# Altium PCB ESP01S麦轮.PcbDoc
Units mm, origin at the board's own origin, x right, y up, seen from the top; angles counter-clockwise.
Board outline 60 x 86 mm, 2 copper layers (Top Layer, Bottom Layer); 22 components, 20 nets, 85 pads, 21 vias.
Unrouted connection lines stored in the file: 18.
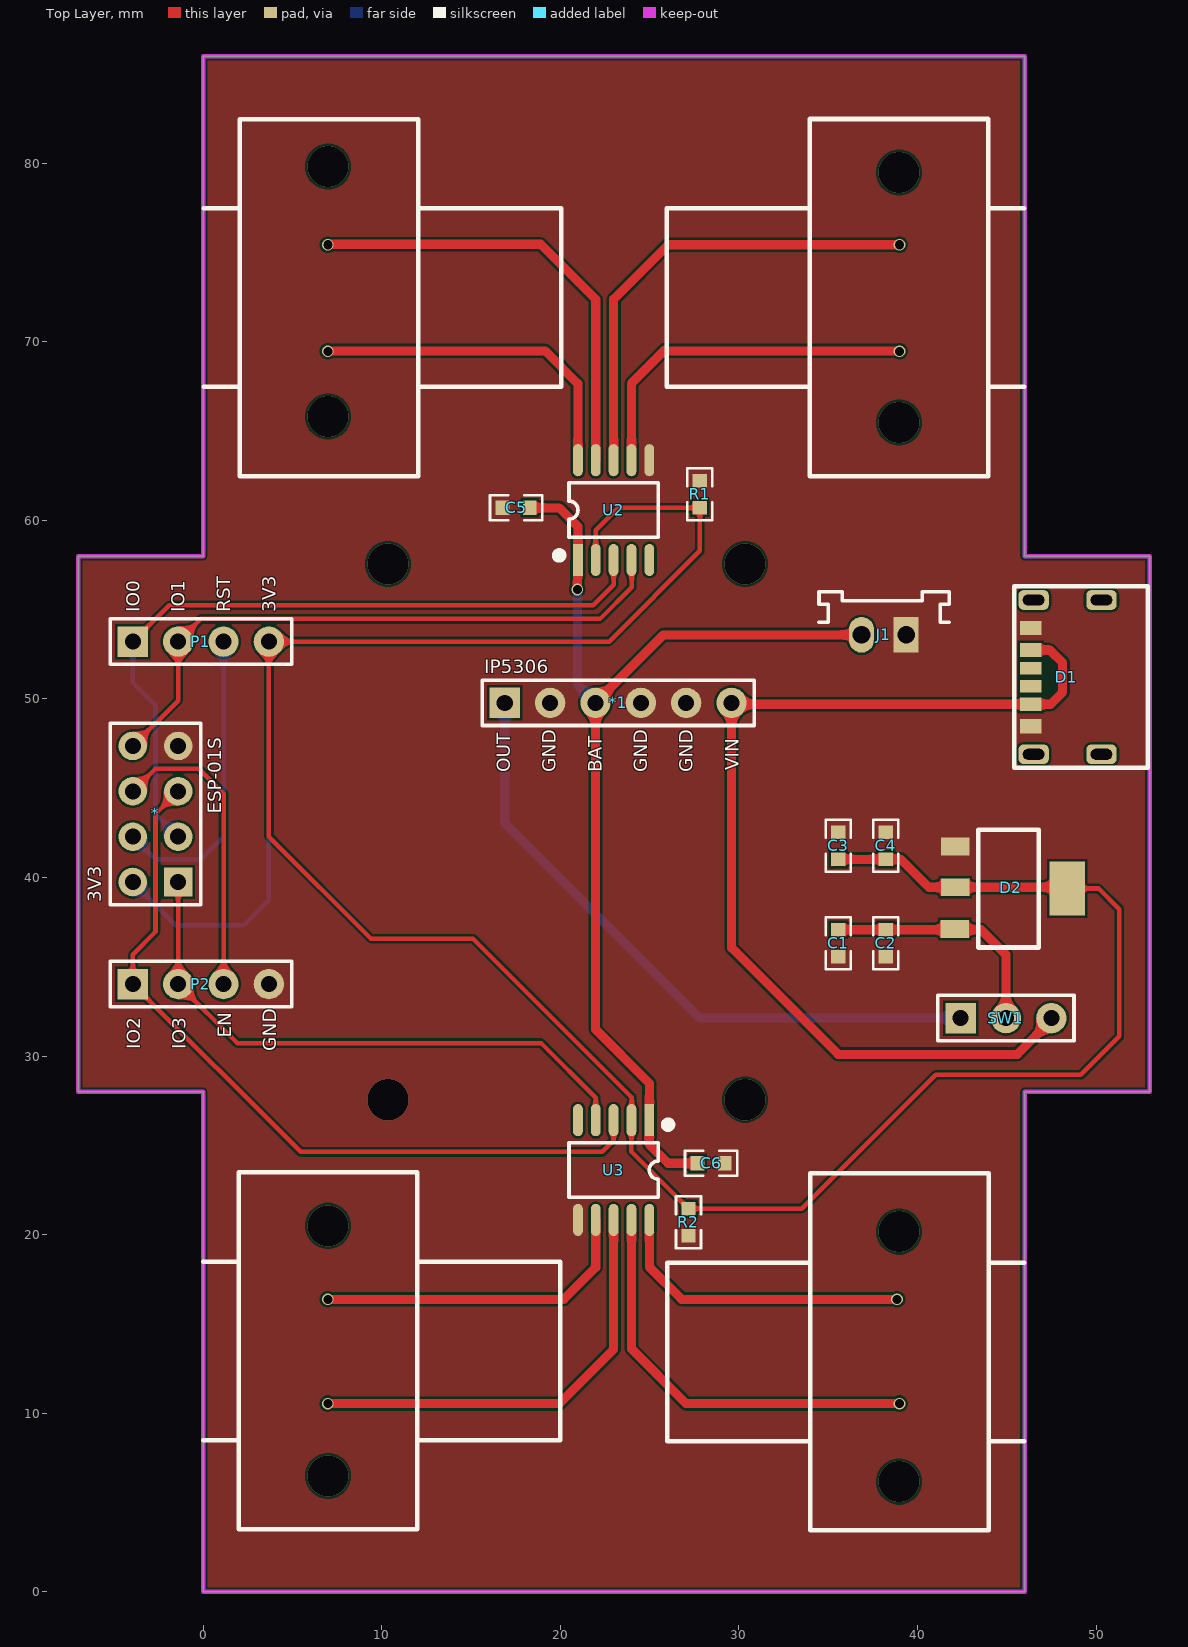
[diagram p0: Top Layer view]
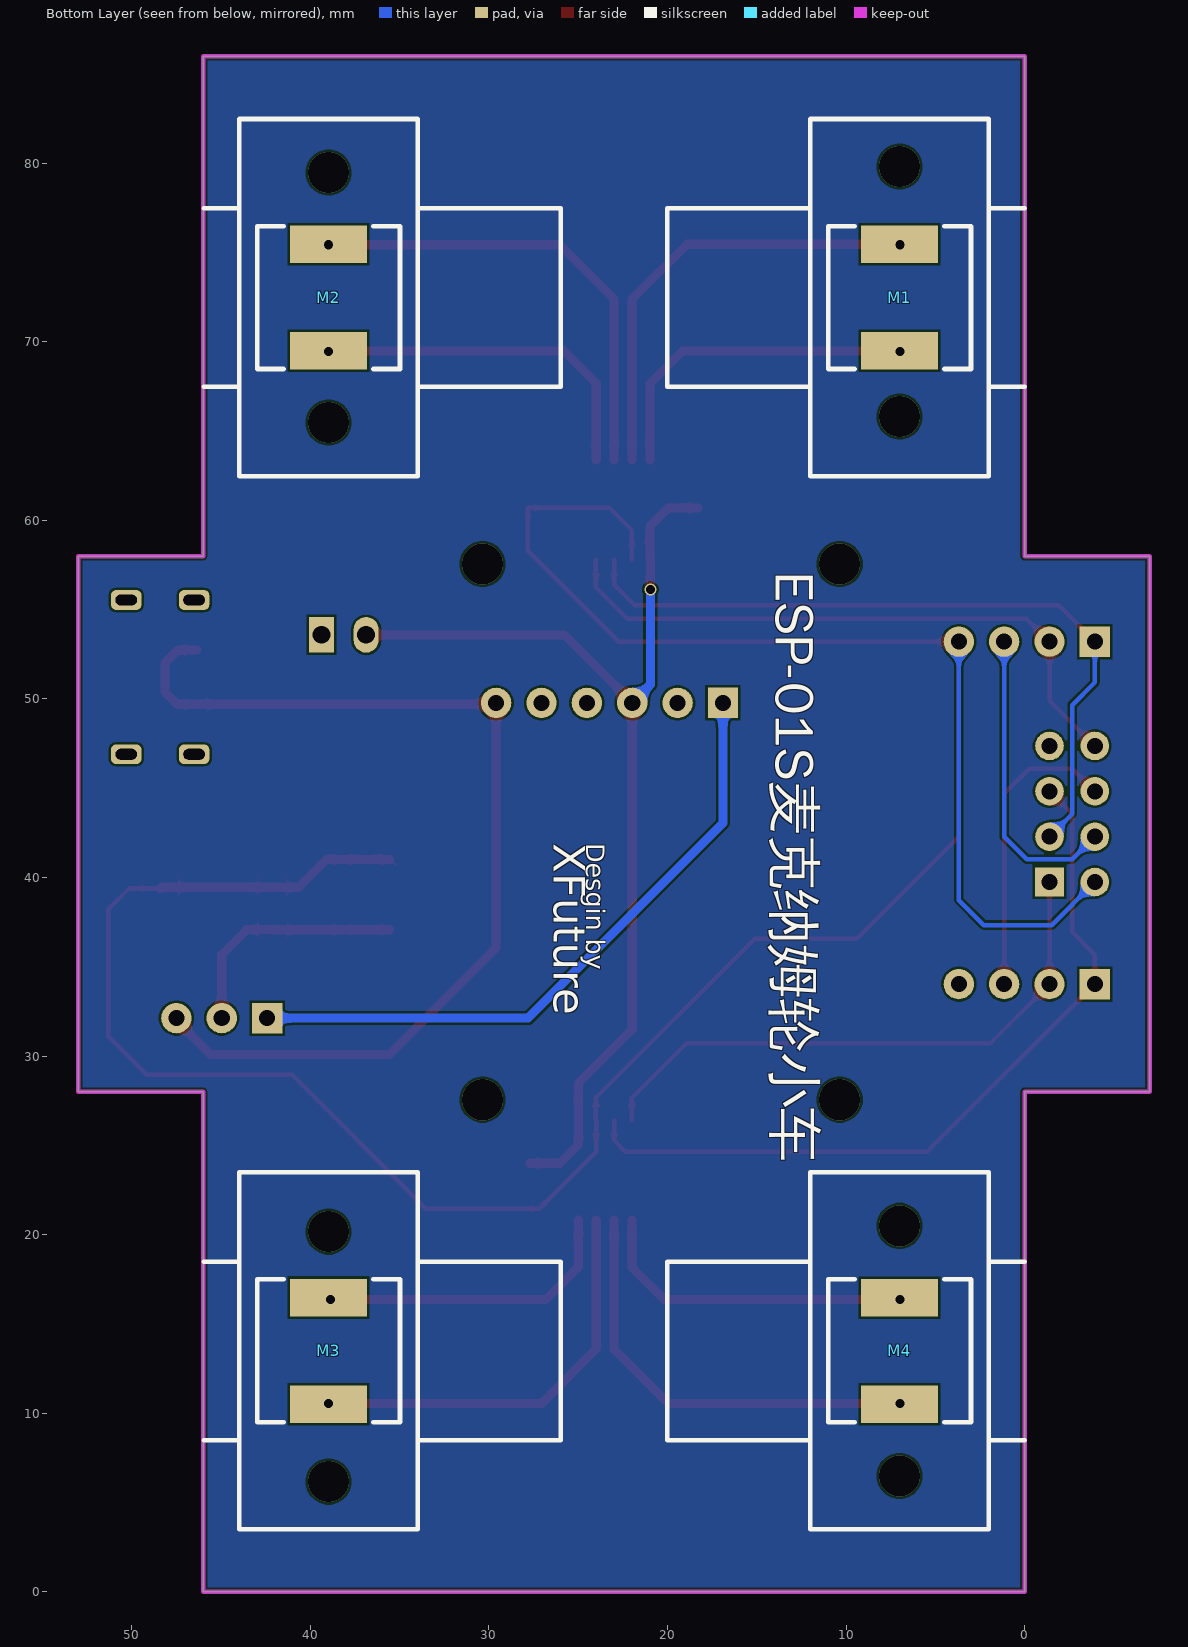
[diagram p1: Bottom Layer view, seen from below]

## Layer stack, top to bottom
Top Solder: solder mask 0.0102, Solder Resist, Dk 3.5
Top Layer: signal copper 0.0356
Dielectric 1: dielectric 0.32, FR-4, Dk 4.8
Bottom Layer: signal copper 0.0356
Bottom Solder: solder mask 0.0102, Solder Resist, Dk 3.5

## Board outline
-7,28 -7,58 0,58 0,86 46,86 46,58 53,58 53,28 46,28 46,0 0,0 0,28

## Design rules (kind name [scope] priority, off if disabled: settings)
Clearance [All] p1: gap=0.127 ignorepadtopadclearanceinfootprint=FALSE
ComponentClearance [All] p1: gap=0 collisioncheckmode=3 verticalgap=0 showdistances=FALSE
DiffPairsRouting [All] p1: maxlimit=0.229 minlimit=0.229 mostfreqgap=0.229 toplayer_minwidth=0.102 toplayer_maxwidth=0.102 toplayer_prefwidth=0.102 bottomlayer_minwidth=0.102 bottomlayer_maxwidth=0.102 bottomlayer_prefwidth=0.102 maxuncoupledlength=12.7
FanoutControl Fanout_BGA [All] p1: bgadir=Out bgaviamode=Centered fanoutstyle=Auto fanoutdirection=Alternating viagrid=0.025 // Fanout_BGA (Default Rule)
HoleSize [All] p1: absolutevalues=TRUE maxlimit=254 minlimit=0.203 maxpercent=80.000 minpercent=20.000
MinimumSolderMaskSliver [All] p1 off: minsoldermaskwidth=0.051
PlaneClearance [All] p1: clearance=0.203
PlaneConnect [All] p1: planeconnectstyle=Direct reliefexpansion=0.508 reliefentries=4 reliefconductorwidth=0.254 reliefairgap=0.254
PolygonConnect [All] p1: connectstyle=Direct reliefconductorwidth=0.254 reliefentries=4 polygonreliefangle="90 Angle" airgapwidth=0.254
RoutingVias [All] p1: holewidth=0.203 width=0.406 viastyle="Through Hole" minholewidth=0.152 minwidth=0.305 maxholewidth=0.711 maxwidth=1.27
SilkToSilkClearance [All] p1: silktosilkclearance=0
SilkToSolderMaskClearance [IsPad] p1: minsilkscreentomaskgap=0 clearancetoexposedcopper=TRUE
SolderMaskExpansion [All] p1: expansion=0.076 istentingtop=FALSE
Width [All] p1: maxlimit=254 minlimit=0.102 preferedwidth=0.102
21 further rules are at their usual default settings.

## Components (designator, comment, footprint, x,y, rotation, side; value= is the part's Value field where it differs from the comment)
* "ESP01S" 2*4排针 -2.413,43.307 r90 top
*1 "充电模块" 1*6排针 23.114,49.657 r0 top
C1 "10uF" 0603C 35.56,36.322 r270 top
C2 "0.1uF" 0603C 38.227,36.322 r270 top
C3 "10uF" 0603C 35.56,41.779 r90 top
C4 "0.1uF" 0603C 38.227,41.779 r90 top
C5 "10uF" 0603C 17.526,60.706 r180 top
C6 "10uF" 0603C 28.444,24.003 r0 top
D1 "TypeC-6" TypeC-6 49.403,49.491 r180 top
D2 "AMS1117" AMS1117 45.212,38.862 r270 top
J1 "PIN-2_3.7V锂电池" XH2.54_2PIN 38.1,54.102 r180 top
M1 "电机" 电机触点 3,76.479 r0 bottom
M2 "电机" 电机触点 42.974,68.479 r180 bottom
M3 "电机" 电机触点 42.974,9.5 r180 bottom
M4 "电机" 电机触点 3,17.5 r0 bottom
P1 "4PIN" 1*4排针 -0.381,53.086 r0 top
P2 "4PIN" 1*4排针 -0.381,33.909 r0 top
R1 "10K" 0603C 27.813,61.468 r270 top
R2 "10K" 0603C 27.178,20.701 r90 top
SW1 "三脚开关" 1*3排针 44.958,32.004 r0 top
U2 "TMI8549" SOP-10 22.987,60.579 r90 top
U3 "TMI8549" SOP-10 22.987,23.622 r270 top

## Footprints (in the part's own frame and the unit in brackets; to place one, negate y for a bottom-side part, rotate by r counter-clockwise, add the part's x,y. Pads: shape width x height; smd on the part's side, far side on the other; paste and mask are expansions set on the pad)
1*3排针 [mm]
  rect 1.7x1.7 hole 0.9: 1(-2.54,0.127)
  round 1.7 hole 0.9: 2(0,0.127) 3(2.54,0.127)
  silkscreen extent -3.81,-1.14 3.81,1.4, body extent -3.81,-1.14 3.81,1.4, height 8.5
1*4排针 [mm]
  rect 1.7x1.7 hole 0.9: 1(-3.556,0.127)
  round 1.7 hole 0.9: 2(-1.016,0.127) 3(1.524,0.127) 4(4.064,0.127)
  silkscreen extent -4.83,-1.14 5.33,1.4, body extent -4.83,-1.14 5.33,1.4, height 8.5
1*6排针 [mm]
  rect 1.7x1.7 hole 0.9: 1(-6.223,0.127)
  round 1.7 hole 0.9: 2(-3.683,0.127) 3(-1.143,0.127) 4(1.397,0.127) 5(3.937,0.127) 6(6.477,0.127)
  silkscreen extent -7.49,-1.14 7.75,1.4, body extent -7.49,-1.14 7.75,1.4, height 8.5
2*4排针 [mm]
  rect 1.6x1.6 hole 0.9: 1(-3.556,-1.016)
  round 1.6 hole 0.9: 2(-1.016,-1.016) 3(1.524,-1.016) 4(4.064,-1.016) 5(4.064,1.524) 6(1.524,1.524) 7(-1.016,1.524) 8(-3.556,1.524)
  silkscreen extent -4.83,-2.29 5.33,2.79, body extent -4.83,-2.29 5.33,2.79, height 8.5
0603C [mm]
  rect 0.76x0.8 smd: 1(-0.758,0) 2(0.762,0)
  silkscreen extent -1.46,-0.7 1.46,0.7
AMS1117 [mm]
  rect 1x1.6 smd: 1(-2.872,-3.086) 2(-0.597,-3.103) 3(1.745,-3.116)
  rect 3x2 smd: 2(-0.526,3.171)
  silkscreen extent -3.83,-1.8 2.78,1.58, body extent -3.88,-3.73 2.82,3.47, height 1.85
SOP-10 [mm]
  rect 1.8x0.55 smd: 1(-2.794,2)
  oval 1.8x0.55 smd: 2(-2.794,1) 3(-2.794,0) 4(-2.794,-1) 5(-2.794,-2) 6(2.794,-2) 7(2.794,-1) 8(2.794,0) 9(2.794,1) 10(2.794,2)
  silkscreen extent -2.69,-2.5 1.52,3.2, body extent -3,-2.45 3,2.45, height 1.55
TypeC-6 [mm]
  rect 1.2x0.7 smd: A5(3.048,-1.234) B5(3.048,-2.234)
  rect 1.2x0.76 smd: A9(3.048,-3.254) B9(3.048,-0.214)
  rect 1.2x0.8 smd: A12(3.048,-4.484) B12(3.048,1.016)
  rrect50% 1.7x1.1 hole 0.6 slot 1.2 at 0 deg: ""(-0.902,2.586) ""(-0.902,-6.054) ""(2.898,2.586) ""(2.898,-6.054)
  silkscreen extent -3.5,-6.81 3.99,3.35, body extent -3.54,-6.2 3.36,2.74, height 3.18
XH2.54_2PIN [mm]
  rect 1.4x2 hole 1: 1(-1.27,0.508)
  oval 1.4x2 hole 1: 2(1.23,0.508)
  silkscreen extent -3.68,-1.91 3.61,-0.2
电机触点 [mm]
  rect 4.3x2.1 smd: 1(4,6.985) 2(4,1.016)
  silkscreen extent 0,0 8,8

## Part data
C1 C2 C3 C4 C5 C6: library part CAP
J1: library part PIN-2
R1 R2: library part RES
SW1: library part SWITCH-NKK-M201x, "Switch"
U2 U3: library part TMI8529

## Via types
v1: diameter 2.3, hole 2.3, Top Layer to Bottom Layer, 12 vias
v2: diameter 0.66, hole 0.508, Top Layer to Bottom Layer, tented both sides, 9 vias

## Nets (pads, with @x,y where several pads share a name; then routed paths per layer and width w, separated by ;. In a path a pad name is that pad's centre, name@x,y a point inside that pad or via, vN(x,y) a via of type N, cw(c..) or ccw(c..) an arc to the next point about the centre after c; other vN are vias at no path point)
3V3: *.8 C3.1 C4.1 D2.2 P1.4 R1.2 R2.2 U2.2 U3.2 | length 157.8
  Top Layer w0.102: U3.2 U3.2@24.003,26.432 ; C3.1@35.211,40.672 35.211,40.692 35.54,41.021 C3.1
  Top Layer w0.254: U2.2 21.987,59.452 23.241,60.706 R1.2 27.813,58.293 22.733,53.213 P1.4 3.683,42.291 9.398,36.576 15.113,36.576 24.003,27.686 U3.2@24.003,26.432 ; U3.2 23.987,24.654 R2.2 33.528,21.463 41.021,28.956 49.149,28.956 51.308,31.115 51.308,38.227 50.147,39.388 D2.2@48.383,39.388
  Top Layer w0.508: C3.1 C4.1 39.078,41.021 40.64,39.459 42.109,39.459 48.312,39.459 D2.2@48.383,39.388
  Bottom Layer w0.254: *.8 -1.524,37.338 2.286,37.338 3.683,38.735 P1.4
5V: C1.1 C2.1 D2.3 SW1.2 | length 13.6
  Top Layer w0.508: C1.1 42.059,37.08 D2.3 ; D2.3@42.063,37.084 43.561,37.084 44.958,35.687 SW1.2
BAT: *1.3 C5.1 C6.1 J1.2 U2.1 U3.1 | length 59
  Top Layer w0.508: C5.1 19.939,60.706 20.987,59.658 U2.1 ; v2(20.955,56.134) U2.1@20.955,57.753 ; C6.1 26.035,24.003 24.987,25.051 U3.1 24.987,28.48 21.971,31.496 *1.3 25.781,53.594 J1.2
  Bottom Layer w0.508: v2(20.955,56.134) 20.955,50.8 *1.3
BAT_5V: *1.1 SW1.1 | length 36.8
  Bottom Layer w0.508: *1.1 16.891,43.053 27.813,32.131 SW1.1
EN: *.6 P2.3 | length 16.9
  Top Layer w0.254: *.6 -2.667,46.101 -0.254,46.101 1.143,44.704 P2.3
GND: *1.2 *1.4 *1.5 *.4 C1.2 C2.2 C3.2 C4.2 C5.2 C6.2 D1.A12 D1.B12 D2.1 J1.1 P2.4 R1.1 R2.1 U2.6 U3.6
  other v1: 10.353,27.559
GPIO0: *.2 P1.1 U2.3 | length 41.6
  Top Layer w0.254: P1.1 -1.905,55.245 21.844,55.245 22.987,56.388 U2.3
  Bottom Layer w0.254: P1.1 -3.937,50.927 -2.667,49.657 -2.667,43.561 *.2
GPIO1: *.5 P1.2 U2.4 | length 35.1
  Top Layer w0.254: *.5 -1.397,49.911 P1.2 -0.127,54.483 22.225,54.483 24.003,56.261 24.003,57.769 U2.4
GPIO2: *.3 P2.1 U3.3 | length 44.1
  Top Layer w0.254: *.3 -2.667,43.561 -2.667,36.957 -3.937,35.687 P2.1 5.461,24.638 22.352,24.638 22.987,25.273 U3.3
GPIO3: *.1 P2.2 U3.4 | length 33
  Top Layer w0.254: *.1 P2.2 1.905,30.734 18.923,30.734 21.987,27.67 U3.4
M1_A: M1.1 U2.10 | length 19
  Top Layer w0.508: v2@7,69.494 19.152,69.494 20.987,67.659 U2.10
  other v2: 6.985,69.469
M1_B: M1.2 U2.9 | length 25.3
  Top Layer w0.508: v2@7,75.463 18.898,75.463 21.987,72.374 U2.9
  other v2: 6.985,75.438
M2_A: M2.1 U2.8 | length 26.2
  Top Layer w0.508: U2.8 22.987,72.39 26.035,75.438 v2@38.948,75.438
  other v2: 38.989,75.438
M2_B: M2.2 U2.7 | length 20.1
  Top Layer w0.102: 25.866,69.554 25.95,69.554 26.009,69.495
  Top Layer w0.508: U2.7 23.987,67.675 25.866,69.554 ; 26.009,69.495 v2@38.974,69.495
  other v2: 38.989,69.469
M3_A: M3.1 U3.10 | length 17.3
  Top Layer w0.508: U3.10 24.987,18.193 26.797,16.383 v2@38.872,16.383
  other v2: 38.862,16.383
M3_B: M3.2 U3.9 | length 23.5
  Top Layer w0.508: U3.9 23.987,13.605 27.051,10.541 v2@38.949,10.541
  other v2: 38.989,10.541
M4_A: M4.1 U3.8 | length 24.5
  Top Layer w0.508: v2@7.026,10.541 19.939,10.541 22.987,13.589 U3.8
  other v2: 6.985,10.541
M4_B: M4.2 U3.7 | length 18.3
  Top Layer w0.508: v2@7.101,16.383 20.193,16.383 21.987,18.177 U3.7
  other v2: 6.985,16.383
RST: *.7 P1.3 | length 17.1
  Bottom Layer w0.254: *.7 -2.667,41.021 -0.127,41.021 1.143,42.291 P1.3
VCC_5V: *1.6 D1.A9 D1.B9 SW1.3 | length 57.6
  Top Layer w0.102: SW1.3@47.498,32.004 SW1.3
  Top Layer w0.508: D1.A9 47.419,52.745 48.133,52.031 48.133,50.38 47.458,49.705 D1.B9 29.67,49.705 *1.6 29.591,36.068 35.56,30.099 45.593,30.099 SW1.3@47.498,32.004
pads on no net: D1. D1.A5 D1.B5 U2.5 U3.5
copper on no net:
  other v1: 38.974,6.17 7,6.5 38.974,20.17 7,20.5 30.353,27.559 10.353,57.559 30.353,57.559 38.974,65.479 7,65.809 38.974,79.479 7,79.809

## Polygon pours and split planes (outlines as drawn)
GND on Top Layer "GND_L01_P000" (solid, pour order 0): 0,85.979 0,58.039 -6.985,58.039 -6.985,27.94 0,27.94 0,0 45.974,0 45.974,27.94 52.959,27.94 52.959,58.039 45.974,58.039 45.974,85.979
no net on Bottom Layer "NONET_L02_P001" (solid, pour order 1): 0,85.979 0,58.039 -6.985,58.039 -6.985,27.94 0,27.94 0,0 45.974,0 45.974,27.94 52.959,27.94 52.959,58.039 45.974,58.039 45.974,85.979

## Keep-outs
Keep-Out Layer:
  the board outline again, w0.254

## Silkscreen, mask and mechanical layers (free items; w line width, h text height)
Top Overlay:
  lines w0.254: 0,8.5 2,8.5 ; 0,18.5 2,18.5 ; 0.043,67.472 2.043,67.472 ; 0.043,77.472 2.043,77.472 ; 12,8.5 20,8.5 20,18.5 12,18.5 ; 12.043,67.472 20.043,67.472 20.043,77.472 12.043,77.472 ; 33.974,67.479 25.974,67.479 25.974,77.479 33.974,77.479 ; 33.986,8.443 25.986,8.443 25.986,18.443 33.986,18.443 ; 43.974,67.479 45.974,67.479 ; 43.974,77.479 45.974,77.479 ; 43.986,8.443 45.986,8.443 ; 43.986,18.443 45.986,18.443 ; 2,3.5 2,23.5 12,23.5 12,3.5 2,3.5 ; 2.043,62.472 2.043,82.472 12.043,82.472 12.043,62.472 2.043,62.472 ; 33.974,62.479 43.974,62.479 43.974,82.479 33.974,82.479 33.974,62.479 ; 33.986,3.443 43.986,3.443 43.986,23.443 33.986,23.443 33.986,3.443
  text "IO0" at -3.556,54.864 h0.76 r90
  text "IO1" at -1.016,54.864 h0.76 r90
  text "RST" at 1.524,54.864 h0.76 r90
  text "3V3" at 4.064,54.864 h0.76 r90
  text "IP5306" at 15.748,51.435 h0.76
  text "VIN" at 29.992,46.019 h0.76 r90
  text "OUT" at 17.19,45.892 h0.76 r90
  text "GND" at 19.75,45.892 h0.76 r90
  text "BAT" at 22.311,45.892 h0.76 r90
  text "GND" at 24.871,45.892 h0.76 r90
  text "GND" at 27.432,45.892 h0.76 r90
  text "ESP-01S" at 1.016,43.561 h0.76 r90
  text "3V3" at -5.715,38.608 h0.76 r90
  text "EN" at 1.569,31.027 h0.76 r90
  text "IO2" at -3.511,30.392 h0.76 r90
  text "IO3" at -0.971,30.392 h0.76 r90
  text "GND" at 4.109,30.265 h0.76 r90
Bottom Overlay:
  lines w0.254: 0,8.5 2,8.5 ; 0,18.5 2,18.5 ; 0,67.479 2,67.479 ; 0,77.479 2,77.479 ; 12,8.5 20,8.5 20,18.5 12,18.5 ; 12,67.479 20,67.479 20,77.479 12,77.479 ; 33.974,8.5 25.974,8.5 25.974,18.5 33.974,18.5 ; 33.974,67.479 25.974,67.479 25.974,77.479 33.974,77.479 ; 43.974,8.5 45.974,8.5 ; 43.974,18.5 45.974,18.5 ; 43.974,67.479 45.974,67.479 ; 43.974,77.479 45.974,77.479 ; 2,3.5 12,3.5 12,23.5 2,23.5 2,3.5 ; 2,62.479 2,82.479 12,82.479 12,62.479 2,62.479 ; 33.974,3.5 43.974,3.5 43.974,23.5 33.974,23.5 33.974,3.5 ; 33.974,62.479 43.974,62.479 43.974,82.479 33.974,82.479 33.974,62.479
  text "ESP-01S麦克纳姆轮小车" at 14.655,57.15 h3.81 r90
  text "Desgin by" at 24.914,41.91 h1.78 r90
  text "XFuture" at 26.955,41.91 h3.05 r90